# Altium PCB PCB_20230109_2023-01-11.pcbdoc
Units mil, origin at the board's own origin, x right, y up, seen from the top; angles counter-clockwise.
Board outline 1022.44 x 1034 mil, 2 copper layers (Top Layer, Bottom Layer); 36 components, 26 nets, 218 pads, 54 vias.
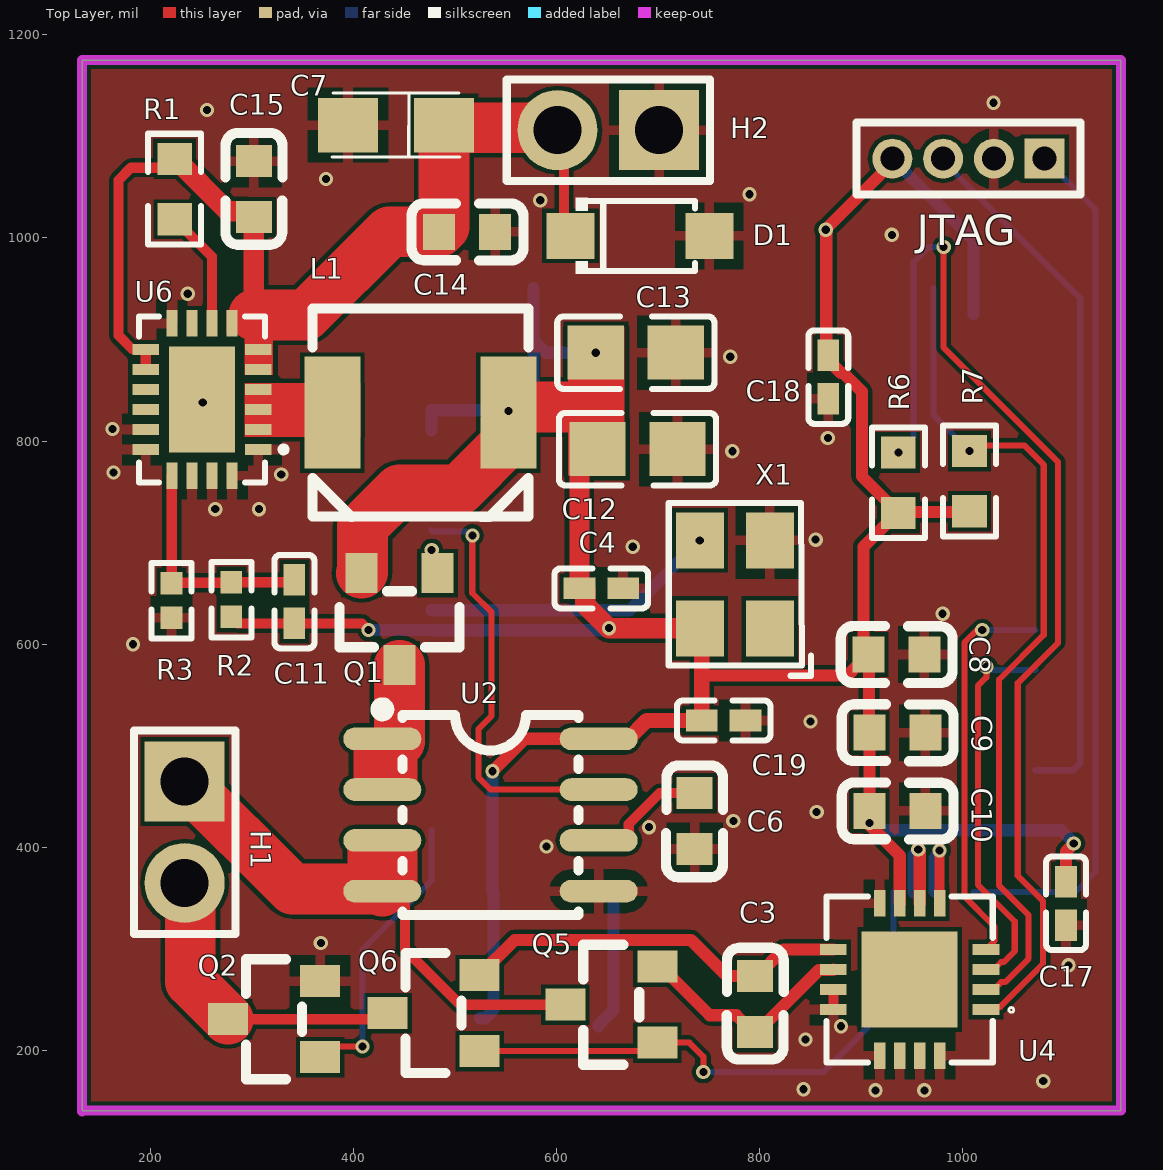
[diagram p0: Top Layer view]
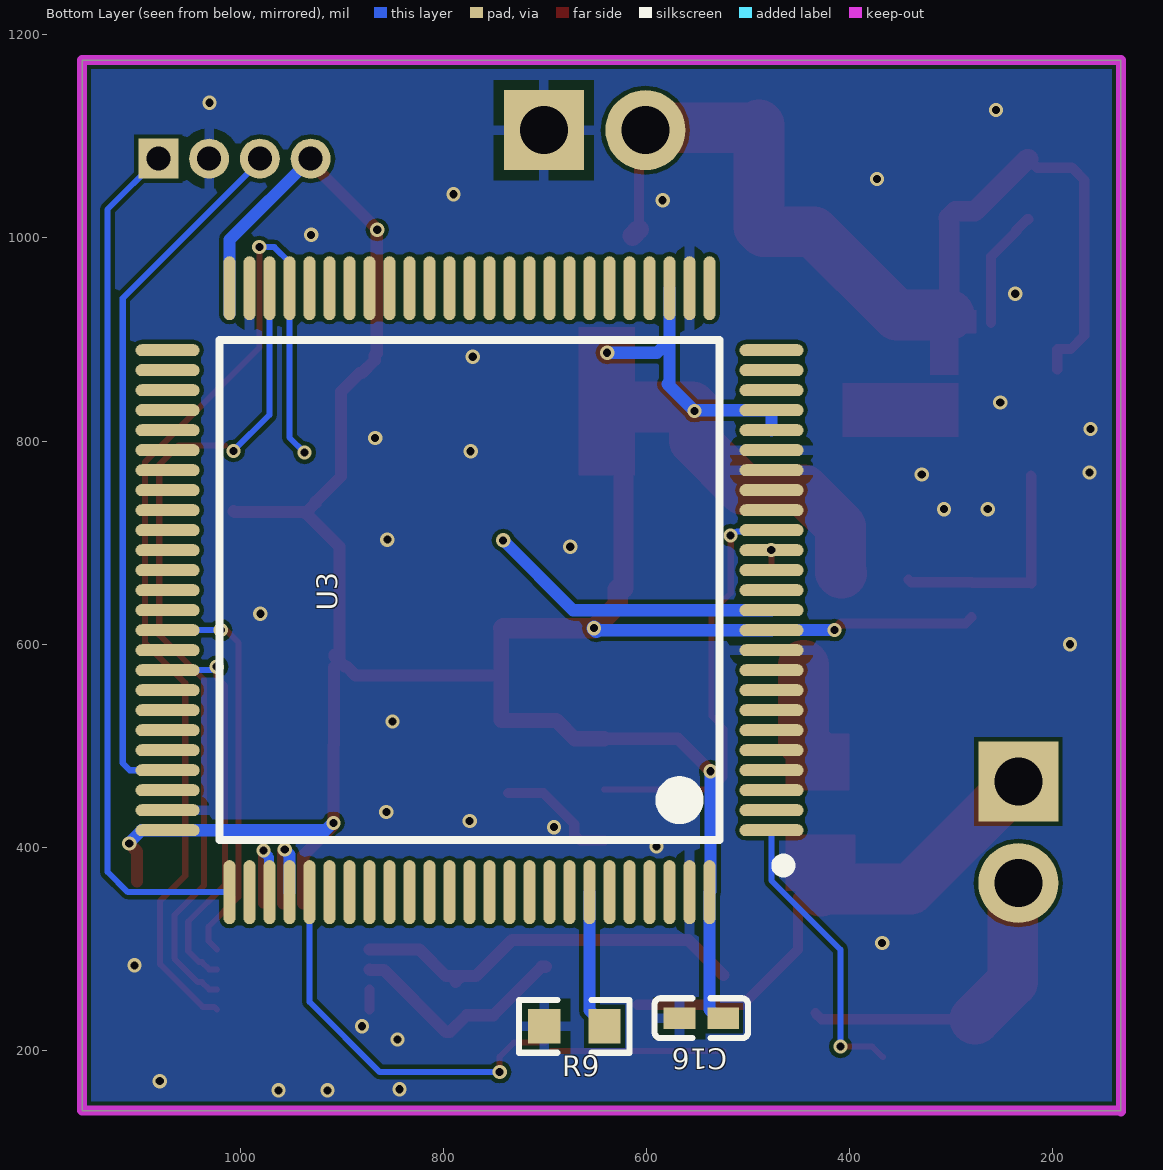
[diagram p1: Bottom Layer view, seen from below]

## Layer stack, top to bottom
Top Solder: solder mask 0.4, Solder Resist, Dk 3.5
Top Layer: signal copper 1.4
Dielectric1: dielectric 12.6, FR-4, Dk 4.8
Bottom Layer: signal copper 1.4
Bottom Solder: solder mask 0.4, Solder Resist, Dk 3.5

## Board outline
133,778.45 133,1175 1155.44,1175 1155.44,141 133,141

## Design rules (kind name [scope] priority, off if disabled: settings)
Clearance [All] p1: gap=4 ignorepadtopadclearanceinfootprint=TRUE except(0: Arc-Hole Track-Hole SMDPad-Hole THPad-Hole Via-Hole Fill-Hole Poly-Hole Region-Hole Text-Hole)
HoleToHoleClearance [All] p1: gap=0 allowstackedmicrovias=TRUE
MinimumSolderMaskSliver [All] p1: minsoldermaskwidth=0
PolygonConnect [All] p1: thpad.connectstyle=Relief thpad.reliefconductorwidth=10 thpad.reliefentries=4 thpad.polygonreliefangle="90 Angle" thpad.airgapwidth=10 smdpad.connectstyle=Relief smdpad.reliefconductorwidth=10 smdpad.reliefentries=4 smdpad.polygonreliefangle="90 Angle" smdpad.airgapwidth=10 via.connectstyle=Direct via.reliefconductorwidth=10 via.reliefentries=4 via.polygonreliefangle="90 Angle" via.airgapwidth=10
RoutingVias [All] p1: holewidth=8 width=14 viastyle="Through Hole" minholewidth=8 minwidth=14 maxholewidth=50 maxwidth=65
SilkToSilkClearance [All] p1: silktosilkclearance=0
SilkToSolderMaskClearance [IsPad] p1: minsilkscreentomaskgap=0 clearancetoexposedcopper=TRUE
SolderMaskExpansion [All] p1: expansion=0 istentingtop=FALSE useseparateexpansions=TRUE expansionbottom=0 istentingbottom=FALSE
Width [All] p1: maxlimit=100 minlimit=6 preferedwidth=10
26 further rules are at their usual default settings.

## Components (designator, comment, footprint, x,y, rotation, side; value= is the part's Value field where it differs from the comment)
C3 "470pF" C0603 795.45,246 r270 top
C4 "100nF" C0402_NEW 644,655 r0 top
C6 "1nF" C0603 736,426 r90 top
C7 "10uF" CASE-A_3216 442,1111 r180 top
C8 "1uF" C0603 934.45,590 r180 top
C9 "0.1uF" C0603 935.45,513 r180 top
C10 "0.01uF" C0603 935.45,436 r180 top
C11 "10pF" C0402 342,642 r90 top
C12 "47uF" C0805 679.63,792 r180 top
C13 "47uF" C0805 678,887 r180 top
C14 "22uF" C0603 512,1006 r180 top
C15 "22uF" C0603 302,1048 r270 top
C16 "100nF" C0402_NEW 546,232 r180 bottom
C17 "100nF" C0402_NEW 1101.44,345 r90 top
C18 "100nF" C0402_NEW 867.45,863 r90 top
C19 "100nF" C0402_NEW 764.46,525 r0 top
D1 "SMF5.0A_C2758488" SOD-123FL_L2.7-W1.8-LS3.7-RD 682,1002 r0 top
H1 "KH-2.54PH180-1X2P-L11.5" HDR-TH_2P-P2.54-V-M 234,415 r270 top
H2 "KH-2.54PH180-1X2P-L11.5" HDR-TH_2P-P2.54-V-M 651,1106 r180 top
JTAG "MHDR1X4" MHDR1X4 1080.44,1078 r180 top
L1 "SPM5015T-1R0M-LR" IND-SMD_L5.4-W5.1_SPM5020 466,828 r0 top (schematic designator 1uH)
Q1 "SI2329DS-T1-GE3" SOT-23_L2.9-W1.3-P1.90-LS2.4-BR 445.4,624.72 r90 top
Q2 "SI2342DS-T1-GE3" SOT-23_L2.9-W1.3-P1.90-LS2.4-BR 322,231 r0 top
Q5 "SI2342DS-T1-GE3" SOT-23_L2.9-W1.3-P1.90-LS2.4-BR 653.89,245.28 r0 top
Q6 "SI2342DS-T1-GE3" SOT-23_L2.9-W1.3-P1.90-LS2.4-BR 479,237 r0 top
R1 "100k" R0603 224,1048 r90 top
R2 "453kΩ" R0402 280,644 r270 top
R3 "100kΩ" R0402 221,643 r90 top
R6 "4.7k" R0603 936.45,759 r270 top
R7 "4.7k" R0603 1006.45,760.66 r270 top
R9 "10k" R0603 671,224 r180 bottom
U2 "ACS725LLCTR-05AB-T" SOIC-8_L5.0-W4.0-P1.27-LS6.1-BL 535,432 r270 top
U3 "STM32F103VET6" LQFP-100_L14.0-W14.0-P0.50-LS16.0-BL 774.12,653.24 r90 bottom
U4 "LDC1314RGHR" QFN-16_L4.0-W4.0-P0.50-TL-EP2.4 947.6,270.1 r180 top
U6 "ISL8016IR33Z" QFN-20_L4.0-W3.0-P0.5-TL-EP2.7 251,841 r180 top
X1 "8MHz" OSC-SMD_4P-L3.2-W2.5-BL 775.45,659 r90 top

## Footprints (in the part's own frame and the unit in brackets; to place one, negate y for a bottom-side part, rotate by r counter-clockwise, add the part's x,y. Pads: shape width x height; smd on the part's side, far side on the other; paste and mask are expansions set on the pad)
C0402 [mm]
  rect 0.79x0.54 smd: 1(-0.545,0) 2(0.545,0)
  silkscreen extent -1.17,-0.5 1.17,0.5
C0402_NEW [mm]
  rect 0.79x0.54 smd: 1(-0.545,0) 2(0.545,0)
  silkscreen extent -1.17,-0.5 1.17,0.5
C0603 [mm]
  rect 0.8x0.9 smd: 1(-0.7,0) 2(0.7,0)
  silkscreen extent -1.41,-0.71 1.39,0.72
C0805 [mm]
  rect 1.41x1.35 smd: 1(-1,0) 2(1,0)
  silkscreen extent -1.96,-0.9 1.96,0.9
CASE-A_3216 [mm]
  rect 1.5x1.359 smd: 1(-1.2,0) 2(1.2,0)
  silkscreen extent -1.6,-0.8 1.6,0.8
HDR-TH_2P-P2.54-V-M [mm]
  rect 2x2 hole 1.2: 1(-1.27,0)
  round 2 hole 1.2: 2(1.27,0)
  silkscreen extent -2.54,-1.27 2.54,1.27
IND-SMD_L5.4-W5.1_SPM5020 [mm]
  rect 1.4x2.8 smd: 1(-2.2,0) 2(2.2,0)
  silkscreen extent -2.7,-2.6 2.7,2.6
LQFP-100_L14.0-W14.0-P0.50-LS16.0-BL [mm]
  oval 0.3x1.6 smd: 1(-6,-7.55) 2(-5.5,-7.55) 3(-5,-7.55) 4(-4.5,-7.55) 5(-4,-7.55) 6(-3.5,-7.55) 7(-3,-7.55) 8(-2.5,-7.55) 9(-2,-7.55) 10(-1.5,-7.55) 11(-1,-7.55) 12(-0.5,-7.55) 13(0,-7.55) 14(0.5,-7.55) 15(1,-7.55) 16(1.5,-7.55) 17(2,-7.55) 18(2.5,-7.55) 19(3,-7.55) 20(3.5,-7.55) 21(4,-7.55) 22(4.5,-7.55) 23(5,-7.55) 24(5.5,-7.55) 25(6,-7.55) 51(6,7.55) 52(5.5,7.55) 53(5,7.55) 54(4.5,7.55) 55(4,7.55) 56(3.5,7.55) 57(3,7.55) 58(2.5,7.55) 59(2,7.55) 60(1.5,7.55) 61(1,7.55) 62(0.5,7.55) 63(0,7.55) 64(-0.5,7.55) 65(-1,7.55) 66(-1.5,7.55) 67(-2,7.55) 68(-2.5,7.55) 69(-3,7.55) 70(-3.5,7.55) 71(-4,7.55) 72(-4.5,7.55) 73(-5,7.55) 74(-5.5,7.55) 75(-6,7.55)
  oval 1.6x0.3 smd: 26(7.55,-6) 27(7.55,-5.5) 28(7.55,-5) 29(7.55,-4.5) 30(7.55,-4) 31(7.55,-3.5) 32(7.55,-3) 33(7.55,-2.5) 34(7.55,-2) 35(7.55,-1.5) 36(7.55,-1) 37(7.55,-0.5) 38(7.55,0) 39(7.55,0.5) 40(7.55,1) 41(7.55,1.5) 42(7.55,2) 43(7.55,2.5) 44(7.55,3) 45(7.55,3.5) 46(7.55,4) 47(7.55,4.5) 48(7.55,5) 49(7.55,5.5) 50(7.55,6) 76(-7.55,6) 77(-7.55,5.5) 78(-7.55,5) 79(-7.55,4.5) 80(-7.55,4) 81(-7.55,3.5) 82(-7.55,3) 83(-7.55,2.5) 84(-7.55,2) 85(-7.55,1.5) 86(-7.55,1) 87(-7.55,0.5) 88(-7.55,0) 89(-7.55,-0.5) 90(-7.55,-1) 91(-7.55,-1.5) 92(-7.55,-2) 93(-7.55,-2.5) 94(-7.55,-3) 95(-7.55,-3.5) 96(-7.55,-4) 97(-7.55,-4.5) 98(-7.55,-5) 99(-7.55,-5.5) 100(-7.55,-6)
  silkscreen extent -7.03,-8 6.25,6.25
MHDR1X4 [mm] "Connector; Header; 4 Position"
  rect 1x1 hole 0.6: 1(0,0)
  round 1 hole 0.6: 2(1.27,0) 3(2.54,0) 4(3.81,0)
  silkscreen extent -0.9,-0.9 4.71,0.9
OSC-SMD_4P-L3.2-W2.5-BL [mm]
  rect 1.4x1.2 smd: 1(-1.1,-0.875) 2(1.1,-0.875) 3(1.1,0.875) 4(-1.1,0.875)
  silkscreen extent -2.29,-1.9 2.03,1.65
QFN-16_L4.0-W4.0-P0.50-TL-EP2.4 [mm]
  rect 0.665x0.28 smd: 1(-1.908,0.75) 2(-1.908,0.25) 3(-1.908,-0.25) 4(-1.908,-0.75) 9(1.907,-0.75) 10(1.907,-0.25) 11(1.907,0.25) 12(1.907,0.75)
  rect 0.28x0.665 smd: 5(-0.75,-1.907) 6(-0.25,-1.907) 7(0.25,-1.907) 8(0.75,-1.907) 13(0.75,1.907) 14(0.25,1.907) 15(-0.25,1.907) 16(-0.75,1.907)
  rect 2.4x2.4 smd: 17(0,0)
  silkscreen extent -2.6,-2.08 2.08,2.08
QFN-20_L4.0-W3.0-P0.5-TL-EP2.7 [mm]
  rect 0.665x0.28 smd: 1(-1.408,1.25) 2(-1.408,0.75) 3(-1.408,0.25) 4(-1.408,-0.25) 5(-1.408,-0.75) 6(-1.408,-1.25) 11(1.407,-1.25) 12(1.407,-0.75) 13(1.407,-0.25) 14(1.407,0.25) 15(1.407,0.75) 16(1.407,1.25)
  rect 0.28x0.665 smd: 7(-0.75,-1.907) 8(-0.25,-1.907) 9(0.25,-1.907) 10(0.75,-1.907) 17(0.75,1.907) 18(0.25,1.907) 19(-0.25,1.907) 20(-0.75,1.907)
  rect 1.65x2.65 smd: 21(0,0)
  silkscreen extent -2.11,-2.08 1.58,2.08
R0402 [mm]
  rect 0.566x0.54 smd: 1(-0.433,0) 2(0.433,0)
  silkscreen extent -0.94,-0.5 0.94,0.5
R0603 [mil]
  rect 31.75x34.02 smd: 1(-29.65,0) 2(29.65,0)
  silkscreen extent -55,-26 55,26
SOD-123FL_L2.7-W1.8-LS3.7-RD [mm]
  rect 1.2x1.15 smd: 1(-1.735,0) 2(1.735,0)
  silkscreen extent -1.6,-0.95 1.38,0.95
SOIC-8_L5.0-W4.0-P1.27-LS6.1-BL [mil]
  oval 22.38x76.78 smd: 1(-75,-106.5) 2(-25,-106.5) 3(25,-106.5) 4(75,-106.5) 5(75,106.5) 6(25,106.5) 7(-25,106.5) 8(-75,106.5)
  silkscreen extent -110,-112 98,87
SOT-23_L2.9-W1.3-P1.90-LS2.4-BR [mm]
  rect 1x0.8 smd: 1(1.15,-0.95) 2(1.15,0.95) 3(-1.15,0)
  silkscreen extent -0.7,-1.5 0.7,1.5

## Part data
C3: BOM_JLCPCB Part Class="Extended Part", BOM_Manufacturer=YAGEO(国巨), BOM_Manufacturer Part=CC0603KRX7R9BB471, BOM_Supplier=LCSC, BOM_Supplier Part=C107092, nameAlias=Capacitance, spicePre=C, spiceSymbolName=CC0603KRX7R9BB471
C4 C16 C17 C18 C19: BOM_JLCPCB Part Class="Basic Part", BOM_Manufacturer=SAMSUNG(三星), BOM_Manufacturer Part=CL05B104KO5NNNC, BOM_Supplier=LCSC, BOM_Supplier Part=C1525, nameAlias=Capacitance, spicePre=C, spiceSymbolName=CL05B104KO5NNNC
C6: BOM_JLCPCB Part Class="Extended Part", BOM_Manufacturer=YAGEO(国巨), BOM_Manufacturer Part=CC0603KRX7R9BB102, BOM_Supplier=LCSC, BOM_Supplier Part=C100040, nameAlias=Capacitance, spicePre=C, spiceSymbolName=CC0603KRX7R9BB102
C7: BOM_JLCPCB Part Class="Extended Part", BOM_Manufacturer="Kyocera AVX", BOM_Manufacturer Part=TAJA106K010RNJ, BOM_Supplier=LCSC, BOM_Supplier Part=C7177, nameAlias=Capacitance, spicePre=C, spiceSymbolName=TAJA106K010RNJ
C8: library part 1u, Contributor=LCEDA_Lib, nameAlias=Value(F), spicePre=C, spiceSymbolName=C_0603_US
C9: library part 0.1u, Contributor=LCEDA_Lib, nameAlias=Value(F), spicePre=C, spiceSymbolName=C_0603_US
C10: library part 0.01u, Contributor=LCEDA_Lib, nameAlias=Value(F), spicePre=C, spiceSymbolName=C_0603_US
C11: BOM_JLCPCB Part Class="Extended Part", BOM_Manufacturer=YAGEO(国巨), BOM_Manufacturer Part=CC0402JRNPO9BN100, BOM_Supplier=LCSC, BOM_Supplier Part=C106199, nameAlias=Capacitance, spicePre=C, spiceSymbolName=CC0402JRNPO9BN100
C12 C13: BOM_JLCPCB Part Class="Basic Part", BOM_Manufacturer=SAMSUNG(三星), BOM_Manufacturer Part=CL21A476MQYNNNE, BOM_Supplier=LCSC, BOM_Supplier Part=C16780, nameAlias=Capacitance, spicePre=C, spiceSymbolName=CL21A476MQYNNNE
C14 C15: BOM_JLCPCB Part Class="Basic Part", BOM_Manufacturer=SAMSUNG(三星), BOM_Manufacturer Part=CL10A226MQ8NRNC, BOM_Supplier=LCSC, BOM_Supplier Part=C59461, nameAlias=Capacitance, spicePre=C, spiceSymbolName=CL10A226MQ8NRNC
D1: BOM_JLCPCB Part Class="Extended Part", BOM_Manufacturer=UMW(广东友台半导体), BOM_Manufacturer Part=SMF5.0A, BOM_Supplier=LCSC, BOM_Supplier Part=C2758488, Contributor=LCSC, spicePre=D, spiceSymbolName=SMF5.0A_C2758488
H1 H2: BOM_JLCPCB Part Class="Extended Part", BOM_Manufacturer=kinghelm(金航标), BOM_Manufacturer Part=KH-2.54PH180-1X2P-L11.5, BOM_Supplier=LCSC, BOM_Supplier Part=C2905434, Contributor=LCSC, spicePre=H, spiceSymbolName=KH-2.54PH180-1X2P-L11.5
JTAG: "Header, 4-Pin", LatestRevisionDate=17-Jul-2002, LatestRevisionNote="Re-released for DXP Platform.", Publisher="Altium Limited"
L1: BOM_JLCPCB Part Class="Extended Part", BOM_Manufacturer=TDK, Inductance=1uH, BOM_Manufacturer Part=SPM5015T-1R0M-LR, BOM_Supplier=LCSC, BOM_Supplier Part=C1329923, Contributor=LCSC, spicePre=U, spiceSymbolName=SPM5015T-1R0M-LR
Q1 Q2 Q5 Q6: BOM_JLCPCB Part Class="Extended Part", BOM_Manufacturer=VISHAY(威世), BOM_Supplier=LCSC, Contributor=LCSC, spicePre=Q
  Q1: BOM_Manufacturer Part=SI2329DS-T1-GE3, BOM_Supplier Part=C85167, spiceSymbolName=SI2329DS-T1-GE3
  Q2 Q5 Q6: BOM_Manufacturer Part=SI2342DS-T1-GE3, BOM_Supplier Part=C142553, spiceSymbolName=SI2342DS-T1-GE3
R2 R3: library part 450kΩ, BOM_JLCPCB Part Class="Extended Part", BOM_Manufacturer=UNI-ROYAL(厚声), BOM_Manufacturer Part=0402WGF4503TCE, Resistance (Ohms)=450K, BOM_Supplier=LCSC, BOM_Supplier Part=C407681, Contributor=LCSC, nameAlias=Resistance, spicePre=R, spiceSymbolName=0402WGF4503TCE
U2: BOM_Manufacturer=ALLEGRO(美国埃戈罗), BOM_Manufacturer Part=ACS725LLCTR-05AB-T, BOM_Supplier=LCSC, BOM_Supplier Part=C3684552, Contributor=lcsc, link=https://atta.szlcsc.comnull, spicePre=U, spiceSymbolName=ACS725LLCTR-05AB-T
U3: BOM_JLCPCB Part Class="Extended Part", BOM_Manufacturer=ST(意法半导体), BOM_Manufacturer Part=STM32F103VET6, BOM_Supplier=LCSC, BOM_Supplier Part=C8308, spicePre=U, spiceSymbolName=STM32F103VET6
U4: BOM_JLCPCB Part Class="Extended Part", BOM_Manufacturer=TI(德州仪器), BOM_Manufacturer Part=LDC1314RGHR, BOM_Supplier=LCSC, BOM_Supplier Part=C2667027, Contributor=LCSC, spicePre=U, spiceSymbolName=LDC1314RGHR
U6: BOM_JLCPCB Part Class="Extended Part", BOM_Manufacturer=RENESAS(瑞萨)/IDT, BOM_Manufacturer Part=ISL8016IR33Z, BOM_Supplier=LCSC, BOM_Supplier Part=C1356368, Contributor=lcsc, link=https://atta.szlcsc.comnull, spicePre=U, spiceSymbolName=ISL8016IR33Z
X1: BOM_JLCPCB Part Class="Extended Part", BOM_Manufacturer=EPSON(爱普生), BOM_Manufacturer Part=Q33310F70055100, BOM_Supplier=LCSC, BOM_Supplier Part=C70556, nameAlias=Frequency, spicePre=X, spiceSymbolName=Q33310F70055100
R1 R6 R7 R9: Contributor=LCEDA_Lib, nameAlias=Value(Ω), spicePre=R, spiceSymbolName=R_0603_US

## Via types
v1: diameter 14, hole 8, Top Layer to Bottom Layer, tented both sides, 54 vias

## Nets (pads, with @x,y where several pads share a name; then routed paths per layer and width w, separated by ;. In a path a pad name is that pad's centre, name@x,y a point inside that pad or via, vN(x,y) a via of type N, cw(c..) or ccw(c..) an arc to the next point about the centre after c; other vN are vias at no path point)
5V: C7.1 C14.2 C15.2 D1.1 H2.2 R1.2 U6.5 U6.6 U6.7 U6.11 U6.12 | length 1016.1
  Top Layer w10: U6.12 U6.11 195.08,890.73 182.13,890.73 169,903.86 169,1057 181,1069 215.34,1069 R1.2 ; D1.1@607.35,1008.35 H2.2@607.35,1099.65
  Top Layer w20: R1.2 225.13,1077.65 276.6,1026.19 296.25,1026.19 C15.2 ; C15.2@302.72,1019.72 C15.2 ; 303.3,922.74 302,924.04 C15.2 ; C7.1 C7.1@491.74,1108.5 ; H2.2@598.5,1108.5 H2.2 H2.2@607.35,1099.65 ; D1.1@607.35,1008.35 D1.1
  Top Layer w50: 302,924.04 353.38,924.04 435.34,1006 C14.2 489.24,1010.8 C7.1 ; C7.1@491.74,1108.5 H2.2@598.5,1108.5
GND: C4.2 C6.1 C7.2 C8.1 C9.1 C10.1 C12.1 C13.1 C14.1 C15.1 C16.1 C17.1 C18.1 C19.2 D1.2 H2.1 JTAG.2 Q2.2 R3.1 R9.1 U2.5 U3.10 U3.19 U3.20 U3.27 U3.49 U3.74 U3.99 U4.8 U4.11 U4.12 U4.13 U4.14 U4.15 U4.16 U6.1 U6.10 U6.15 U6.16 U6.18 U6.19 U6.20 U6.21 X1.2 | length 19.7
  Top Layer w10: U4.12 U4.11
  other v1: 914,161 962,161 843,162 1079,170 845,211 880,224 1104,284 368,306 590,401 691,420 774,426 856,435 850,524 183,600 980,630 675,696 855,703 264,733 307,733 329,767 164,769 773,790 867,803 163,812 251.73,837.86 771,883 237,945 930,1003 584,1037 790,1043 373,1058 256,1126 1030,1133
LIN: H1.1 Q5.3 U2.3 U2.4 | length 495.8
  Top Layer w10: U2.4 444.98,357 450.7,351.28 450.7,299.82 505.23,245.28 Q5.3
  Top Layer w50: H1.1 340,359 426.5,359 U2.4
LOUT: H1.2 Q2.3 Q6.3 | length 311.2
  Top Layer w10: Q2.3 427.73,231 Q6.3
  Top Layer w50: H1.2 239.5,359.5 239.5,268.23 Q2.3
MCO: U3.67 U4.3 | length 384.1
  Top Layer w6: U4.3 1030.28,279.94 1037.45,287.11 1040.11,287.11 1050.96,297.96 1050.96,327.16 1014.61,363.51 1014.61,559.01 1023,567.4 v1(1023,578)
  Bottom Layer w6: v1(1023,578) 1025.16,578 1028.66,574.5 U3.67
Net1uH_1: L1.1 U6.2 U6.3 U6.4
NetC3_1: C3.1 Q6.2 U4.9 | length 396.2
  Top Layer w12: Q6.2 558.88,309 732.28,309 767.72,273.56 C3.1@782,273.56 ; C3.1@787.74,267.82 C3.1@782,273.56 ; U4.9 823.48,299.63 797.41,273.56 C3.1 C3.1@782,273.56
NetC3_2: C3.2 Q5.2 U4.10 | length 225.4
  Top Layer w12: Q5.2 703.11,282.69 750.83,234.97 776.96,234.97 793.48,218.45 C3.2 797.41,218.45 858.42,279.45 872.02,279.45 U4.10
NetC6_2: C6.2 U2.6 | length 119.9
  Top Layer w10: U2.6 665.35,407 671.07,412.72 671.07,423.21 701.42,453.56 C6.2
NetC11_2: C11.2 R2.1 R3.2 U6.17 | length 228.1
  Top Layer w10: R3.2 R3.2@221.24,660.28 ; U6.17 221.24,765.67 R3.2@221.24,660.28 ; C11.2 339.58,661.04 R2.1 279.5,660.54 221.5,660.54 R3.2@221.24,660.28
NetQ1_3: Q1.3 U2.1 U2.2 | length 99.7
  Top Layer w50: 428,487 445.4,504.4 Q1.3
NetR1_1: R1.1 U6.8 | length 118.2
  Top Layer w10: R1.1 225.13,1018.35 236.01,1007.47 236.01,1006.34 260.84,981.5 U6.8
NetR9_2: R9.2 U3.94 | length 138.1
  Bottom Layer w12: R9.2 641.34,225.13 656.01,239.8 U3.94
OSC_IN: U3.12 X1.3 | length 292.6
  Bottom Layer w12: U3.12 672.24,633.56 v1(740.99,702.3)
PB10: R6.1 U3.47 U4.1 | length 1083.1
  Top Layer w6: v1(981,991) 981,892 1093.61,779.39 1093.61,601.51 1053.94,561.84 1053.94,372.18 1078.61,347.51 1078.61,285.01 1036.69,243.08 1025.21,243.08 U4.1
  Bottom Layer w6: v1(936.45,788.66) 951.3,803.51 U3.47 951.3,976.07 966.23,991 v1(981,991)
PB11: R7.1 U3.48 U4.2 | length 818.4
  Top Layer w6: R7.1@1014.61,795.82 1060.3,795.82 1079.53,776.59 1079.53,609.27 1035.61,565.35 1035.61,362.51 1064.61,333.51 1064.61,290.69 1041.49,267.57 1037.6,267.57 1030.28,260.26 U4.2
  Bottom Layer w6: U3.48 970.98,825.78 v1(1006.45,790.31)
PC0: Q1.1 U3.15 | length 25.2
  Top Layer w6: v1(477.08,692.8) 477.08,675.73 Q1.1
PC1: U2.7 U3.16 | length 417
  Top Layer w6: v1@517,707 517,650.48 536,631.48 536,529.6 523,516.6 523,469.2 535.2,457 U2.7
  Bottom Layer w6: U3.16 478,711.19 511.04,711.19 515.03,707.2 v1(517.2,707.2)
PC8: U3.65 U4.4 | length 392.6
  Top Layer w6: v1(1019,614) 1013.68,614 1001.61,601.94 1001.61,351.51 1030.87,322.25 1030.87,307.79 U4.4
  Bottom Layer w6: v1(1019,614) 1019.07,613.93 1071.3,613.93 U3.65
PC10: U3.78 U4.5 | length 95.4
  Top Layer w10: v1(977,397) 977.07,396.94 977.07,345.26 U4.5
  Bottom Layer w10: U3.78 971.32,356.35 971.32,390.24 977,395.92 v1(977,397)
PC11: U3.79 U4.6 | length 97.4
  Top Layer w12: v1(956,398) 956,397.46 957.45,396.01 U4.6
  Bottom Layer w12: U3.79 951.39,356.09 951.39,392.85 956,397.46 v1(956,398)
PC12: Q5.1 Q6.1 U3.80 | length 949.1
  Top Layer w6: Q6.1 Q5.1@694.01,199.59 ; 730.57,207.88 744.44,194 ; 730.57,207.88 Q5.1 730.57,207.88 ; 730.57,207.88 744.45,194 ; 744.44,194 v1(744.45,179) 744.45,194
  Bottom Layer w6: 862.44,179 v1(744.45,179) 862.45,179 ; 862.44,179 931.6,248.16 ; 862.45,179 931.61,248.16 ; 931.6,248.16 U3.80 931.61,248.16
  other v1: 744.44,179
PE2: Q2.1 U3.1 | length 287.2
  Top Layer w6: Q2.1 377.68,204 v1(409,204)
  Bottom Layer w6: v1(409,204) 409,299.56 476.88,367.44 U3.1
SWCLK: JTAG.1 U3.76 | length 851.1
  Bottom Layer w6: U3.76 1110.44,356 1130.44,376 1130.44,1028 JTAG.1
SWDIO: JTAG.3 U3.72 | length 697.9
  Bottom Layer w6: JTAG.3 980.45,1075.55 1115.44,940.56 1115.44,483 1108.51,476.07 U3.72
VOUT_3.3V: C4.1 C8.2 C9.2 C10.2 C11.1 C12.2 C13.2 C16.2 C17.2 C18.2 C19.1 JTAG.4 L1.2 Q1.2 R2.2 R6.2 R7.2 U2.8 U3.11 U3.21 U3.22 U3.28 U3.50 U3.75 U3.100 U4.7 X1.4 | length 3375.7
  Top Layer w10: R2.2 280,626.46 285.91,620.54 C11.1 408.46,620.54 v1(415,614) ; C12.2@622.54,774.28 C12.2
  Top Layer w12: v1(537,475) 569,507 U2.8 ; 743,569.34 886.23,569.34 895.17,578.28 897.14,578.28 C8.2@902,583.14 ; C8.2@902,582.89 907.39,577.5 907.39,501.5 907.89,501 C10.2@907.89,424 ; C8.2 906.89,588.03 C8.2@902,583.14 ; C10.2@907.89,422.03 937.76,392.16 U4.7 ; JTAG.4 930.45,1073.99 865,1008.54 v1(865,1008) 865.38,1007.62 865.38,886.52 C18.2 867.45,879.54 879.89,867.1 882.22,867.1 900.47,848.84 900.47,765.32 925.44,740.35 925.44,739.22 R6.2@935.31,729.34 ; R7.2 1005.62,730.17 937.27,730.17 R6.2 R6.2@935.31,729.34 ; C17.2 1101.45,396.05 1109,403.6 v1(1109,404) ; C8.2@902,583.14 902,696.03 R6.2@935.31,729.34
  Top Layer w15: U2.8 670.7,507 688.7,525 C19.1 743,569.34 743,613.69 X1.4
  Top Layer w20: C12.2@622.54,774.28 C4.1 627.47,655 628.1,654.37 628.1,638.9 v1@651.3,615.7 ; v1(651.5,615.89) 740.79,615.89 X1.4
  Top Layer w50: Q1.2 409,671 409,715.73 445.41,752.14 504.32,752.14 552.62,800.44 L1.2 v1(552.62,829.52) 552.62,831.04 555.18,833.6 636.07,833.6 ; 636.08,827.58 636.08,833.6
  Bottom Layer w12: v1(415,614) 415.06,613.93 476.82,613.93 U3.11 v1@649.48,613.87 ; U3.21 U3.22 551.19,830.41 552.08,829.52 v1(552.62,829.52) 579.28,856.18 577.37,858.09 577.37,899.3 ; C16.2 529.47,232 537.91,240.44 U3.100 537,356.91 v1(537,475) ; U3.28 577.37,950.39 577.37,899.3 ; v1(638.63,887) 589.67,887 577.37,899.3 ; v1(908.09,424.19) 908.63,424.19 915.8,417.02 U3.75 1096.77,417.02 1108.62,405.17 1108.62,404.38 v1(1109,404) ; JTAG.4 1010.35,998.1 U3.50 U3.50@1010.35,925.08
  Bottom Layer w15: v1@649.48,613.87 v1(651.5,615.89)
pads on no net: U3.2 U3.3 U3.4 U3.5 U3.6 U3.7 U3.8 U3.9 U3.13 U3.14 U3.17 U3.18 U3.23 U3.24 U3.25 U3.26 U3.29 U3.30 U3.31 U3.32 U3.33 U3.34 U3.35 U3.36 U3.37 U3.38 U3.39 U3.40 U3.41 U3.42 U3.43 U3.44 U3.45 U3.46 U3.51 U3.52 U3.53 U3.54 U3.55 U3.56 U3.57 U3.58 U3.59 U3.60 U3.61 U3.62 U3.63 U3.64 U3.66 U3.68 U3.69 U3.70 U3.71 U3.73 U3.77 U3.81 U3.82 U3.83 U3.84 U3.85 U3.86 U3.87 U3.88 U3.89 U3.90 U3.91 U3.92 U3.93 U3.95 U3.96 U3.97 U3.98 U4.17 U6.9 U6.13 U6.14 X1.1

## Polygon pours and split planes (outlines as drawn)
GND on Top Layer "Top Layer-No Net" (solid, remove dead copper, pour order 0): 93,1194 105,1182 1207,1182 1207,138 1186,117 68,117
GND on Bottom Layer "Top Layer-No Net" (solid, remove dead copper, pour order 1): 99,1188 1215,1188 1184,1157 1184,58 171,58 95,134

## Keep-outs
Keep-Out Layer:
  lines w10: 133,140 133,778.45 133,1174 ; 133,141 1155.45,141 1155.45,1175 133,1175

## Other copper
Top Layer:
  rectangle net VOUT_3.3V: 611.07,766.01 667,912.39
  rectangle net 5V: 275,906 321,929
  rectangle net 5V: 293,865 321,919
  rectangle net Net1uH_1: 293,804 407,857
  rectangle net Net1uH_1: 294,833 318,834
  rectangle net LIN: 394,357 463,413
  rectangle net NetQ1_3: 400,456 463,512